# Altium PCB PCB.PcbDoc (part 2 of 2)
Units mm, origin at the board's own origin, x right, y up, seen from the top; angles counter-clockwise.
Board outline 140.5 x 50 mm, 2 copper layers (Top Layer, Bottom Layer), stack 1.69 mm thick; 191 components, 142 nets, 1154 pads, 548 vias.
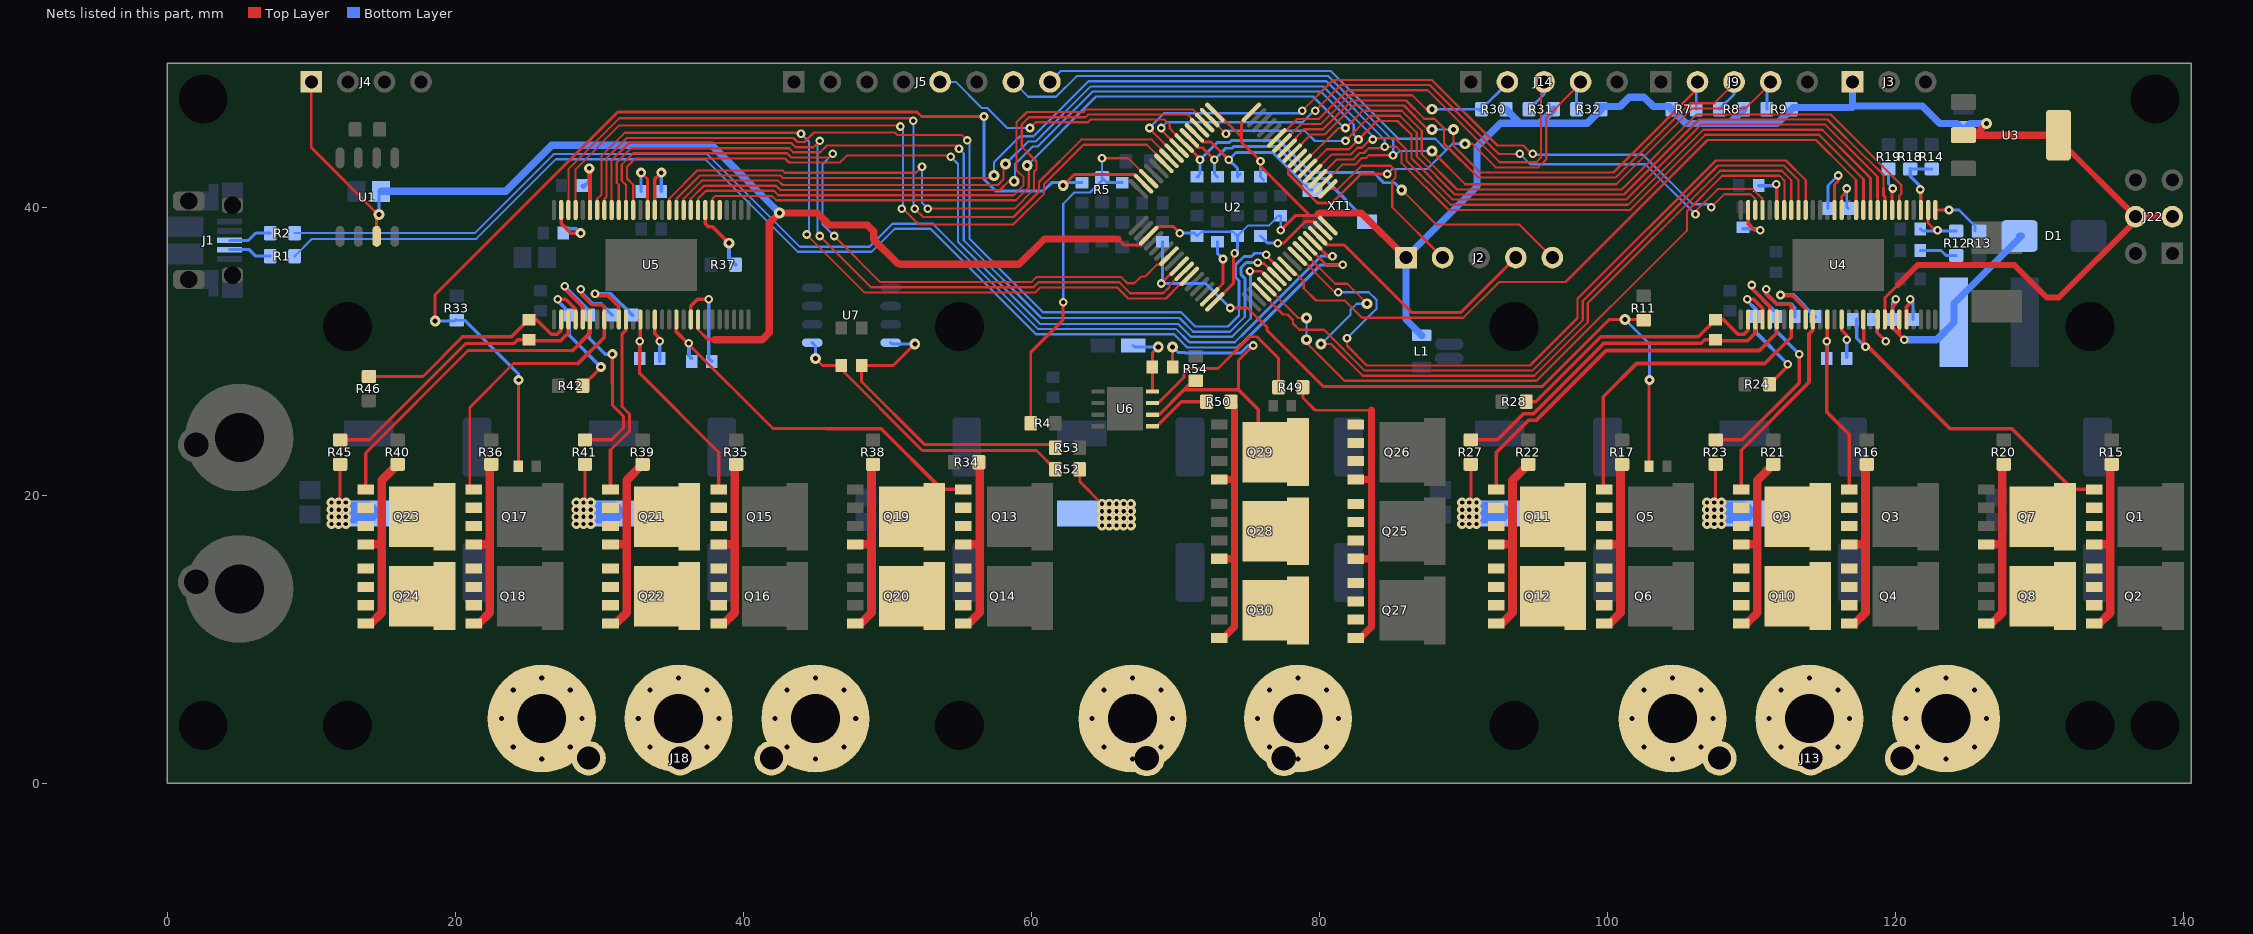
[diagram p2: the nets of this part, all layers, seen from the top]

## Via types
v1: diameter 0.7, hole 0.3, Top Layer to Bottom Layer, 161 vias
v2: diameter 0.8, hole 0.3, Top Layer to Bottom Layer, 136 vias
v3: diameter 0.6, hole 0.3, Top Layer to Bottom Layer, 108 vias
v4: diameter 0.7, hole 0.35, Top Layer to Bottom Layer, 81 vias
v5: diameter 0.75, hole 0.35, Top Layer to Bottom Layer, 57 vias
v6: diameter 0.7, hole 0.3, Top Layer to Bottom Layer, tented bottom, 4 vias
v7: diameter 0.6, hole 0.3, Top Layer to Bottom Layer, tented both sides, 1 vias

## Nets (pads, with @x,y where several pads share a name; then routed paths per layer and width w, separated by ;. In a path a pad name is that pad's centre, name@x,y a point inside that pad or via, vN(x,y) a via of type N, cw(c..) or ccw(c..) an arc to the next point about the centre after c; other vN are vias at no path point) (continued)
M0_BH_1: U2.42 U4.19 | length 52.5
  Top Layer w0.152: U2.42@78.455,36.606 78.555,36.606 81.061,34.1 v3(81.3,34.1) ; v3(81.9,30.9) 81.9,30.395 83.285,29.01 94.614,29.01 97.911,32.307 97.911,33.64 107.517,43.245 112.382,43.245 113.75,41.877 U4.19@113.75,39.8
  Bottom Layer w0.152: v3(81.3,34.1) 83.425,34.1 83.954,33.571 83.954,32.954 v3(81.9,30.9)
M0_BL_1: U2.35 U4.20 | length 48.9
  Top Layer w0.152: U2.35@75.98,34.131 75.98,34.031 77.457,32.554 77.771,32.554 78.154,32.171 78.154,31.921 78.584,31.49 80.302,31.49 83.138,28.655 94.761,28.655 98.266,32.159 98.266,33.492 107.664,42.89 112.234,42.89 113.25,41.874 U4.20@113.25,39.8
M0_CH_1: U2.43 U4.21 | length 53.2
  Top Layer w0.152: U2.43@78.808,36.959 81.089,34.679 81.921,34.679 v5(83.3,33.3) ; v5(80.1,30.5) 80.79,30.5 82.99,28.299 94.909,28.299 98.622,32.012 98.622,33.345 107.811,42.535 112.087,42.535 112.75,41.872 U4.21@112.75,39.8
  Bottom Layer w0.152: v5(80.1,30.5) 80.125,30.5 82.154,32.529 82.154,32.869 82.585,33.3 v5(83.3,33.3)
M0_CL_1: U2.36 U4.22 | length 48.6
  Top Layer w0.152: U2.36@76.333,34.454 U2.36@76.333,34.485 76.343,34.485 78.528,32.3 v5(79.1,32.3) ; v5(79.1,30.8) 79.1,30.575 81.731,27.944 95.056,27.944 105.519,38.407 105.519,39.74 107.958,42.179 111.94,42.179 112.279,41.84 112.279,39.829 U4.22@112.25,39.8
  Bottom Layer w0.152: v5(79.1,30.8) v5(79.1,32.3)
M0_DC_CAL_1: U2.40 U4.12 | length 49.6
  Top Layer w0.152: U2.40@77.748,35.899 77.848,35.899 78.9,34.847 78.9,34.375 79.754,33.521 81.744,33.521 82.946,32.319 89.978,32.319 92.469,34.811 97.072,34.811 106.928,44.667 114.459,44.667 116.5,42.626 117.255,41.871
  Top Layer w0.203: U4.12@117.25,39.8 117.25,40.824 117.255,40.829 117.255,41.871
M0_ENC_A_1: J9.2 R7.2 U2.56 | length 37.1
  Top Layer w0.152: v5(87.8,45.4) 87.513,45.4 85.857,47.056 82.383,47.056 80.382,45.055 79.408,45.055 U2.56@78.295,43.941 ; v5(89.3,45.4) 89.3,44.275 91.165,42.41 100.41,42.41 106.24,48.24 J9.2@106.24,48.6 ; U2.56@78.295,43.941 78.295,44.005 78.101,43.812 U2.56@78.101,43.748 U2.56@78.295,43.941
  Bottom Layer w0.152: v5(87.8,45.4) v5(89.3,45.4)
  Bottom Layer w0.203: R7.2@106.15,46.8 106.15,48.51 J9.2@106.24,48.6
M0_ENC_B_1: J9.3 R8.2 U2.57 | length 40.4
  Top Layer w0.152: U2.57@77.748,44.101 78.381,44.734 78.381,44.857 78.934,45.41 80.234,45.41 82.236,47.412 86.004,47.412 87.27,46.146 87.979,46.146 88.645,45.48 88.645,44.428 91.018,42.055 100.557,42.055 105.718,47.215 107.395,47.215 108.78,48.6 J9.3@108.78,48.445
  Bottom Layer w0.203: R8.2@107.75,46.8 108.78,47.83 J9.3@108.78,48.6
M0_ENC_Z_1: J5.7 J9.4 R9.2 U2.50 | length 68.1
  Top Layer w0.152: U2.50@80.223,41.626 80.236,41.626 81.565,42.955 82.482,42.955 82.937,43.41 83.234,43.41 83.424,43.6 v3(85.1,43.6) ; v5(87.8,43.9) 90.111,41.589 100.594,41.589 105.865,46.86 109.58,46.86 J9.4@111.32,48.6
  Bottom Layer w0.152: J5.7@58.74,48.7 59.769,47.671 61.706,47.671 63.134,49.099 80.622,49.099 85.11,44.611 85.11,43.61 v3(85.1,43.6) 85.262,43.6 85.562,43.9 v5(87.8,43.9)
  Bottom Layer w0.203: R9.2@111.05,46.8 111.05,48.33 J9.4@111.32,48.6
M0_NCS_1: U2.2 U4.8 | length 57.8
  Top Layer w0.152: U2.2@72.374,46.223 73.496,45.1 v3(73.5,45.1) ; v3(81.8,44.6) 81.8,44.619 83.526,46.345 85.562,46.345 86.745,45.163 86.745,43.527 89.394,40.878 101.129,40.878 106.339,46.089 115.263,46.089 117.961,43.39 117.997,43.39 119.145,42.242 119.145,41.371
  Top Layer w0.203: 119.145,41.371 119.145,40.829 119.25,40.724 U4.8@119.25,39.8
  Bottom Layer w0.152: v3(73.5,45.1) 73.7,45.3 78.981,45.3 79.681,44.6 80.4,44.6 80.8,44.6 v3(81.8,44.6)
M0_SO1_1: U2.8 U4.25 | length 50.5
  Top Layer w0.152: v3(69,45.5) 69,45.354 U2.8@70.252,44.101 ; v3(79.7,46.7) 81.478,48.478 87.65,48.478 92.428,43.7 v3(93.9,43.7) ; v3(106.098,39.5) 106.098,39.717 107.636,41.255 110.073,41.255 110.75,40.579 U4.25@110.75,39.8
  Bottom Layer w0.152: v3(69,45.5) 69.4,45.9 78.819,45.9 79.619,46.7 v3(79.7,46.7) ; v3(93.9,43.7) 94.619,42.981 102.617,42.981 v3(106.098,39.5)
M0_SO2_1: U2.9 U4.26 | length 50.8
  Top Layer w0.152: v3(68.197,45.5) 68.197,45.449 U2.9@69.899,43.748 ; v3(78.8,46.7) 80.933,48.833 87.797,48.833 92.351,44.279 94.14,44.279 94.719,43.7 v3(94.8,43.7) ; v3(107.2,40) 108.1,40.9 109.926,40.9 110.25,40.576 U4.26@110.25,39.8
  Bottom Layer w0.152: v3(68.197,45.5) 68.197,45.516 69.202,46.521 78.621,46.521 v3(78.8,46.7) ; v3(94.8,43.7) 94.854,43.646 102.454,43.646 105.9,40.2 107,40.2 v3(107.2,40)
M0_TEMP_1: C23.2 R10.1 R11.1 U2.25 | length 54.1
  Top Layer w0.203: v3(69,34.7) 70.199,35.899 U2.25@70.252,35.899 ; v3(73.8,33) 75.004,33 76.365,31.638 76.365,31.438 80.24,27.563 95.468,27.563 100.105,32.2 v5(101.2,32.2) 102.45,32.2 R11.1@102.5,32.15 ; R10.1@102.875,22 102.875,27.975 v1(102.9,28)
  Bottom Layer w0.203: C23.2@69.1,37.6 69.1,34.8 v3(69,34.7) 72.1,34.7 v3(73.8,33) ; v5(101.2,32.2) 102.9,30.5 v1(102.9,28)
M1_AH_1: U2.37 U5.17 | length 61.1
  Top Layer w0.152: U5.17@32.35,39.8 32.35,41.558 31.915,41.992 31.915,42.808 32.492,43.385 42.886,43.385 43.171,43.099 46.697,43.099 47.177,43.579 54.321,43.579 v3(54.4,43.5)
  Top Layer w0.203: v3(75.164,35.564) 75.179,35.55 75.975,35.55 U2.37@76.687,34.838
  Bottom Layer w0.152: v3(54.4,43.5) 54.9,43 54.9,37.596 60.596,31.9 70.177,31.9 71.077,31 73.923,31 75.217,32.294 75.217,33.05
  Bottom Layer w0.203: v3(75.164,35.564) 75.217,35.512 75.217,33.05
M1_AL_1: U2.23 U5.18 | length 50.6
  Top Layer w0.152: U5.18@31.85,39.8 31.85,41.555 31.56,41.845 31.56,42.955 32.345,43.74 43.033,43.74 43.318,43.455 45.955,43.455 v3(46.2,43.7) ; v3(46.3,38) 49.504,34.796 59.988,34.796 60.337,35.145 66.236,35.145 66.66,34.721 67.14,34.721 67.598,35.179 67.886,35.179 68.706,36 69.039,36 69.445,36.406 69.445,36.606 U2.23@69.545,36.606
  Bottom Layer w0.152: v3(46.2,43.7) 45.5,43 45.5,38.8 v3(46.3,38)
M1_BH_1: U2.38 U5.19 | length 63.6
  Top Layer w0.152: U5.19@31.35,39.8 31.35,41.552 31.205,41.698 31.205,43.102 32.198,44.095 43.18,44.095 43.466,43.81 45.329,43.81 45.798,44.279 54.756,44.279 v3(54.968,44.068)
  Top Layer w0.203: v3(75.71,36.155) 75.769,36.095 76.137,36.095 U2.38@77.041,35.192
  Bottom Layer w0.152: v3(54.968,44.068) 55.3,43.736 55.3,37.698 60.698,32.3 70.279,32.3 71.224,31.355 73.776,31.355 74.811,32.39 74.811,33.05
  Bottom Layer w0.203: 74.811,33.05 74.811,35.063 74.56,35.314 74.56,35.815 74.914,36.169 75.695,36.169 v3(75.71,36.155)
M1_BL_1: U2.26 U5.20 | length 53.4
  Top Layer w0.152: U5.20@30.85,39.8 30.85,41.55 ; 30.849,41.551 30.849,43.249 32.051,44.451 43.327,44.451 43.613,44.165 44.865,44.165 v3(45.3,44.6) ; v3(45.3,38) 48.859,34.441 60.136,34.441 60.485,34.79 66.088,34.79 66.857,34.021 69.14,34.021 69.579,34.46 69.579,34.584 69.947,34.953 70.072,34.953 70.606,35.487 U2.26@70.606,35.545
  Bottom Layer w0.152: v3(45.3,38) 45.145,38.155 45.145,44.445 v3(45.3,44.6)
M1_CH_1: U2.39 U5.21 | length 66
  Top Layer w0.152: U5.21@30.35,39.8 30.35,40.579 30.494,40.723 30.494,43.397 31.903,44.806 43.475,44.806 43.76,44.521 44.24,44.521 44.898,45.179 50.502,45.179 50.66,45.021 55.15,45.021 v3(55.536,44.636)
  Top Layer w0.203: v3@76.3,36.639 U2.39@77.394,35.545
  Bottom Layer w0.152: v3(55.536,44.636) 55.7,44.471 55.7,37.8 60.8,32.7 62,32.7 70.381,32.7 71.36,31.721 73.64,31.721 74.405,32.486 74.405,32.905
  Bottom Layer w0.203: 74.405,32.905 74.405,34.895 74.154,35.146 74.154,35.983 74.746,36.575 75.275,36.575 75.5,36.8 76,36.8 76.1,36.7 v3(76.3,36.7)
M1_CL_1: U2.27 U5.22 | length 55.2
  Top Layer w0.152: U5.22@29.85,39.8 29.85,40.581 30.138,40.87 30.138,43.544 31.756,45.162 43.938,45.162 v3(44,45.1) ; v3(44.4,38.1) 44.4,38.081 48.395,34.085 60.283,34.085 60.632,34.435 65.941,34.435 66.71,33.665 69.333,33.665 70.265,34.597 70.389,34.597 70.399,34.588 70.455,34.588 70.859,34.991 70.859,35.192 U2.27@70.959,35.192
  Bottom Layer w0.152: v3(44,45.1) 44.555,44.545 44.555,38.255 v3(44.4,38.1)
M1_DC_CAL_1: U2.4 U5.12 | length 48.5
  Top Layer w0.152: U5.12@34.85,39.8 34.85,40.587 36.82,42.556 42.709,42.556 42.877,42.388 51.988,42.388 v3(52.4,42.8) ; v3(52.8,39.9) 58.83,39.9 60.165,41.235 60.165,42.44 60.354,42.629 60.354,43.171 59.321,44.204 59.321,45.74 59.83,46.249 63.76,46.249 63.945,46.435 70.848,46.435 71.566,45.716 71.566,45.515 U2.4@71.667,45.515
  Bottom Layer w0.152: v3(52.4,42.8) 52.4,40.3 v3(52.8,39.9)
M1_ENC_A_1: J14.2 R30.2 U2.58 | length 18.3
  Top Layer w0.152: U2.58@77.394,44.455 78.705,45.765 80.087,45.765 82.089,47.767 86.433,47.767 87.4,46.8 v5(87.8,46.8)
  Bottom Layer w0.203: v5(87.8,46.8) 91.05,46.8 91.15,46.7 R30.2@91.25,46.8 91.25,46.81 J14.2@93.04,48.6
M1_ENC_B_1: J14.3 R31.2 U2.59 | length 29.8
  Top Layer w0.152: U2.59@77.041,44.808 77.141,44.808 78.453,46.121 79.94,46.121 81.942,48.122 87.503,48.122 92.504,43.121 95.04,43.121 95.379,43.46 95.379,48.38 95.8,48.38 J14.3@95.58,48.6
  Bottom Layer w0.203: R31.2@94.55,46.8 95.58,47.83 J14.3@95.58,48.6
M1_ENC_Z_1: J5.8 J14.4 R32.2 U2.55 | length 61
  Top Layer w0.152: v5(90.1,44.4) 90.595,44.4 92.229,42.765 95.187,42.765 95.735,43.313 95.735,46.215 J14.4@98.12,48.6
  Top Layer w0.203: U2.55@78.455,43.394 77.823,42.763 77.823,42.322 79.857,40.288 80.856,40.288 82.868,42.3 v3(84.7,42.3)
  Bottom Layer w0.152: J5.8@61.28,48.7 62.034,49.454 80.769,49.454 85.477,44.746 88.029,44.746 88.8,43.975 ; v3(84.7,42.3) 85.045,42.645 87.47,42.645 88.8,43.975 ; v5(90.1,44.4) 89.225,44.4 88.8,43.975
  Bottom Layer w0.203: R32.2@97.85,46.8 97.85,48.33 J14.4@98.12,48.6
M1_NCS_1: U2.3 U5.8 | length 42.5
  Top Layer w0.152: U5.8@36.85,39.8 36.85,40.576 37.408,41.135 42.12,41.135 42.42,40.835 58.76,40.835 59.454,41.529 59.454,42.071 58.965,42.56 58.965,45.887 59.683,46.605 63.612,46.605 63.798,46.79 71.199,46.79 71.92,46.069 71.92,45.869 U2.3@72.02,45.869
M1_SO1_1: U2.11 U5.25 | length 54.5
  Top Layer w0.152: U5.25@28.35,39.8 28.35,42.64 31.389,45.679 50.821,45.679 v3(50.9,45.6) ; v3(51,39.9) 51.081,39.9 52.181,38.8 58.736,38.8 60.876,40.94 60.876,41.604 63.607,44.335 67.998,44.335 69.092,43.241 69.092,43.041 U2.11@69.192,43.041
  Bottom Layer w0.152: v3(50.9,45.6) 51.079,45.421 51.079,39.979 v3(51,39.9)
M1_SO2_1: U2.10 U5.26 | length 55.6
  Top Layer w0.152: U5.26@27.85,39.8 27.85,42.642 31.387,46.179 51.621,46.179 v3(51.8,46) ; v3(51.9,39.9) 52.479,39.321 58.754,39.321 60.52,41.087 60.52,41.751 63.46,44.69 68.349,44.69 69.445,43.594 69.445,43.394 U2.10@69.545,43.394
  Bottom Layer w0.152: v3(51.8,46) 51.8,40 v3(51.9,39.9)
M1_TEMP_1: C41.2 R29.1 R33.1 U2.15 | length 77.1
  Top Layer w0.203: v5(18.6,32.1) 18.6,33.931 31.274,46.605 52.05,46.605 52.355,46.3 v3(56.7,46.3) ; R29.1@24.375,22 24.4,22.025 v1(24.4,28) ; v5(62.2,41.5) 62.958,42.258 67.211,42.258 67.713,41.755 67.713,41.626 U2.15@67.777,41.626
  Bottom Layer w0.203: v5(18.6,32.1) 19.95,32.1 20.05,32.2 R33.1@20.1,32.15 20.65,32.15 24.4,28.4 v1(24.4,28) ; v3(56.7,46.3) 56.7,41.939 57.519,41.12 60.821,41.12 61.4,41.7 C41.2@63.5,41.7
NetC2_1: C2.1 U2.6 XT1.1 | length 16.9
  Top Layer w0.203: U2.6@70.959,44.808 71.024,44.808 71.024,44.68 71.579,44.124 71.876,44.124 v3(72.7,43.3)
  Bottom Layer w0.203: C2.1@72.9,42.1 72.7,42.3 v3(72.7,43.3) 73.49,44.09 73.919,44.09 74.04,44.21 77.026,44.21 79.232,42.005 80.326,42.005 83.3,39.031 XT1.1@83.3,39
NetC3_1: C3.1 U2.5 XT1.3 | length 12.1
  Top Layer w0.203: U2.5@71.313,45.162 71.377,45.162 71.377,45.033 71.88,44.531 72.469,44.531 v3(73.7,43.3)
  Bottom Layer w0.203: C3.1@74.5,42.3 C3.1@74.3,42.1 74.3,42.7 v3(73.7,43.3) 73.703,43.3 74.208,43.804 76.747,43.804 79.352,41.2 XT1.3@79.5,41.2
NetC4_2: C4.2 U2.47 | length 5.5
  Top Layer w0.203: v3(77.1,37.5) 77.5,37.5 79.005,39.005 79.61,39.005 79.662,38.952 79.708,38.952 80.158,38.502 80.158,38.374 U2.47@80.223,38.374
  Bottom Layer w0.203: C4.2@75.9,38 76.4,37.5 v3(77.1,37.5)
NetC5_2: C5.2 U2.31 | length 4.4
  Top Layer w0.203: U2.31@72.374,33.777 73.3,34.704 v3(73.3,36.4)
  Bottom Layer w0.203: C5.2@72.9,37.6 72.9,36.8 v3(73.3,36.4)
NetC24_1: C24.1 R12.1 U4.2 | length 4.3
  Top Layer w0.203: U4.2@122.25,39.8 122.25,38.894 122.744,38.4 v3(122.9,38.4)
  Bottom Layer w0.203: C24.1@121.7,38.5 121.85,38.35 R12.1@124.2,38.35
NetC27_1: C27.1 R12.2 | length 2.6
  Bottom Layer w0.203: C27.1@121.7,37 123.15,37 123.5,36.65 R12.2@124.2,36.65
NetC28_1: C28.1 D1.K L2.1 U4.50 U4.51 | length 17.8
  Top Layer w0.25: v3(120,33.6) 120,33.3 119.75,33.05 119.75,31.65 120.25,31.15 ; U4.51@120.25,32.2 120.25,31.15 ; v3(120.6,30.8) 120.25,31.15
  Bottom Layer w0.25: C28.1@119.8,32.2 119.8,33.4 v3(120,33.6)
  Bottom Layer w0.5: v3(120.6,30.8) 122.84,30.8 L2.1@124.04,32 124.04,33.311 128.729,38 D1.K@128.6,38
NetC28_2: C28.2 U4.52 | length 3
  Top Layer w0.25: U4.52@120.75,32.2 120.75,33.091 121,33.341 v3(121,33.6)
  Bottom Layer w0.203: v3(121,33.6) 121.2,33.4 C28.2@121.2,32.2
NetC30_2: C30.2 U4.48 | length 3.5
  Top Layer w0.203: U4.48@118.75,32.2 118.75,31.25 v3(119.3,30.7)
  Bottom Layer w0.203: C30.2@118.7,32.2 118.7,31.3 v3(119.3,30.7)
NetC31_2: C31.2 U4.43 | length 2.8
  Top Layer w0.203: U4.43@116.25,32.2 U4.43@116.261,32.189
  Top Layer w0.25: U4.43@116.25,32.2 116.25,31.45 116.6,31.1 v3(116.6,30.8)
  Bottom Layer w0.25: C31.2@116.6,29.6 v3(116.6,30.8)
NetC33_1: C33.1 U4.14 | length 3.1
  Top Layer w0.203: U4.14@116.25,39.8 116.25,40.75 116.6,41.1 v3(116.6,41.3)
  Bottom Layer w0.203: v3(116.6,41.3) 116.6,40 C33.1@116.7,39.9
NetC33_2: C33.2 U4.15 | length 5.1
  Top Layer w0.203: U4.15@115.75,39.8 115.75,41.55 116,41.8 v3(116,42.2)
  Bottom Layer w0.203: C33.2@115.3,39.9 115.3,41.5 v3(116,42.2)
NetC34_2: C34.2 U4.38 | length 6
  Top Layer w0.25: v3(112,33.9) 112.033,33.867 112.809,33.867 113.75,32.926 113.75,32.378 113.772,32.4 113.772,32.222 U4.38@113.75,32.2
  Bottom Layer w0.25: v3(112,33.9) 112.9,33.9 C34.2@114.4,32.4
NetC35_2: C35.2 U4.23 | length 3.1
  Top Layer w0.25: v3(111.7,41.6) 111.75,41.55 U4.23@111.75,39.8
  Bottom Layer w0.25: C35.2@110.5,41.5 111.6,41.5 v3(111.7,41.6)
NetC36_1: C36.1 R23.2 U4.33 | length 18.6
  Top Layer w0.25: R23.2@107.5,23.85 109.35,23.85 113.3,27.8 v3(113.3,29.8) ; v3(110,34.6) 110,34.371 111.25,33.121 U4.33@111.25,32.2
  Bottom Layer w0.25: v3(110,34.6) 110,34.371 111.552,32.819 111.681,32.819 111.7,32.8 C36.1@111.7,32.4 111.7,31.4 v3(113.3,29.8)
NetC36_2: C36.2 R24.2 U4.32 | length 9.7
  Top Layer w0.25: v3(109.7,33.6) 110.131,33.6 110.75,32.981 U4.32@110.75,32.2 ; R24.2@111.25,27.7 112.5,28.95 v3(112.5,29.1)
  Bottom Layer w0.25: v3(109.7,33.6) 109.7,33.5 110.3,32.9 C36.2@110.3,32.4 110.3,31.3 v3(112.5,29.1)
NetC37_2: C37.2 U4.27 | length 3.2
  Top Layer w0.25: U4.27@109.75,39.8 109.75,38.861 110.211,38.4 v3(110.6,38.4)
  Bottom Layer w0.25: C37.2@109.4,38.5 110.5,38.5 v3(110.6,38.4)
NetC40_1: C40.1 R27.2 U4.31 | length 23.9
  Top Layer w0.25: R27.2@90.5,23.85 92.35,23.85 94.172,25.672 94.87,25.672 99.7,30.502 99.7,30.547 106.488,30.547 106.741,30.8 C40.1@107.5,30.8 107.581,30.719 109.708,30.719 110.228,31.239 110.228,32.2 U4.31@110.25,32.2
NetC40_2: C40.2 R28.2 U4.30 | length 19.1
  Top Layer w0.25: R28.2@94.35,26.5 95.012,26.5 99.512,31 106.3,31 C40.2@107.5,32.2 108.024,32.2 109.052,31.172 109.472,31.172 109.7,31.4 109.7,31.424 109.728,31.424 109.728,32.178 U4.30@109.75,32.2
NetC42_2: C42.2 U5.48 | length 6.8
  Top Layer w0.25: U5.48@36.35,32.2 36.35,33.139 36.811,33.6 v3(37.6,33.6)
  Bottom Layer w0.25: v3(37.6,33.6) 37.6,29.5 C42.2@37.8,29.3
NetC43_2: C43.2 U5.43 | length 3
  Top Layer w0.25: U5.43@33.85,32.2 33.85,31.23 34.2,30.88 v3(34.2,30.7)
  Bottom Layer w0.25: C43.2@34.2,29.3 v3(34.2,30.7)
NetC45_1: C45.1 U5.14 | length 4.1
  Top Layer w0.25: U5.14@33.85,39.8 33.85,41.95 v1(34.3,42.4)
  Bottom Layer w0.25: C45.1@34.3,41.1 v1(34.3,42.4)
NetC45_2: C45.2 U5.15 | length 4.1
  Top Layer w0.203: v1(32.9,42.4) 33.35,41.95 U5.15@33.35,39.8
  Bottom Layer w0.203: C45.2@32.9,41.1 v1(32.9,42.4)
NetC46_2: C46.2 U5.38 | length 6.3
  Top Layer w0.25: v3(29.7,34) 29.7,33.834 29.733,33.867 30.574,33.867 31.35,33.091 U5.38@31.35,32.2
  Bottom Layer w0.25: v3(29.7,34) 30.8,34 C46.2@32.3,32.5
NetC47_2: C47.2 U5.23 | length 4.5
  Top Layer w0.25: v1(29.3,42.7) 29.35,42.65 U5.23@29.35,39.8
  Bottom Layer w0.25: C47.2@28.8,41.5 28.9,41.4 29.3,41.8 v1(29.3,42.7)
NetC48_1: C48.1 R41.2 U5.33 | length 17.7
  Top Layer w0.203: 30.85,23.85 31.68,24.68 31.68,25.481 30.9,26.261 30.9,27.8
  Top Layer w0.25: v3(27.6,34.5) 27.6,34.317 28.828,33.089 28.828,32.2 U5.33@28.85,32.2 ; R41.2@29,23.85 30.85,23.85 ; 30.9,27.8 v1(30.9,29.8)
  Bottom Layer w0.25: v3(27.6,34.5) 29.3,32.8 29.3,30.9 30.4,29.8 v1(30.9,29.8)
NetC48_2: C48.2 R42.2 U5.32 | length 10.2
  Top Layer w0.25: v3(27.1,33.6) 27.676,33.6 28.328,32.948 28.328,32.2 U5.32@28.35,32.2 ; R42.2@28.85,27.6 30.1,28.85 v1(30.1,28.9) v1@29.9,28.9
  Bottom Layer w0.25: v3(27.1,33.6) 27.1,33.5 27.9,32.7 27.9,31.1 v1(30.1,28.9)
NetC49_2: C49.2 U5.27 | length 3.2
  Top Layer w0.25: U5.27@27.35,39.8 27.35,38.861 28.011,38.2 v1(28.7,38.2)
  Bottom Layer w0.25: C49.2@27.8,38.5 28.4,38.5
NetC52_1: C52.1 R45.2 U5.31 | length 19.9
  Top Layer w0.203: 14.05,23.85 20.747,30.547 24.088,30.547
  Top Layer w0.25: R45.2@12,23.85 14.05,23.85 ; 24.088,30.547 24.341,30.8 C52.1@25.1,30.8 25.181,30.719 27.308,30.719 27.828,31.239 27.828,32.2 U5.31@27.85,32.2
NetC52_2: C52.2 R46.2 U5.30 | length 16.3
  Top Layer w0.203: R46.2@14,28.25 17.75,28.25 20.5,31
  Top Layer w0.25: 20.5,31 23.9,31 C52.2@25.1,32.2 25.624,32.2 26.652,31.172 27.072,31.172 27.3,31.4 27.3,31.424 27.328,31.424 27.328,32.178 U5.30@27.35,32.2
NetC54_1: C54.1 D2.K U6.8 | length 5.1
  Top Layer w0.203: U6.8@68.395,27.2 68.4,27.205 C54.1@68.4,28.9 68.4,29.9 v5(68.8,30.3)
  Bottom Layer w0.203: D2.K@67.05,30.4 67.15,30.3 v5(68.8,30.3)
NetC54_2: C54.2 J19.1 J21.2 Q25.S Q26.S Q27.S Q28.D Q29.D Q30.D R54.1 U6.6 | length 23.6
  Top Layer w0.203: C54.2@69.8,28.9 v5(69.8,30.3) ; 74.37,27.328 74.37,29.37 v3(75.4,30.4)
  Top Layer w0.25: U6.6@68.395,25.6 68.859,25.6 70.587,27.328 ; R54.1@71.4,27.95 71.209,27.95 70.587,27.328 ; Q29.D@75.75,23 75.75,25.948 74.37,27.328 70.587,27.328
  Bottom Layer w0.203: v5(69.8,30.3) 70.2,29.9 70.66,29.9 70.676,29.884 74.535,29.884 75.051,30.4 75.151,30.3 75.251,30.4 v3(75.4,30.4)
  other v4: 78.5,1.7 76.52,2.52 80.48,2.52 75.7,4.5 81.3,4.5 76.52,6.48 80.48,6.48 78.5,7.3
NetC56_1: C56.1 R52.1 U7.1 | length 21.3
  Top Layer w0.203: v5(45,29.5) 45.5,29 C56.1@46.526,29 ; C56.1@46.8,29 C56.1@46.526,29 ; R52.1@61.65,21.8 60.345,23.105 52.421,23.105 C56.1@46.526,29
  Bottom Layer w0.203: U7.1@44.775,30.595 45,30.37 v5(45,29.5)
NetC56_2: C56.2 R53.1 U7.8 | length 22.5
  Top Layer w0.203: v5(51.9,30.5) 50.4,29 C56.2@48.2,29 48.2,27.9 52.589,23.511 61.439,23.511 R53.1@61.65,23.3
  Bottom Layer w0.203: U7.8@50.225,30.595 50.32,30.5 v5(51.9,30.5)
NetJ1_2: J1.2 R1.1 | length 3
  Bottom Layer w0.203: J1.2@4.325,37.05 5.7,37.05 6.15,36.6 R1.1@7.15,36.6
NetJ1_3: J1.3 R2.1 | length 3
  Bottom Layer w0.203: J1.3@4.325,37.7 5.65,37.7 6.15,38.2 R2.1@7.15,38.2
NetJ20_1: J20.1 J21.1 R51.1 R52.2 | length 3.2
  Top Layer w0.203: R52.2@63.35,21.8 63.35,20.95 v1(64.9,19.4) v1@65,19.5
  other v1: 64.9,17.9 65.4,17.9 65.9,17.9 66.4,17.9 66.9,17.9 64.9,18.4 65.4,18.4 65.9,18.4 66.4,18.4 66.9,18.4 64.9,18.9 65.4,18.9 65.9,18.9 66.4,18.9 66.9,18.9 65.4,19.4 65.9,19.4 66.4,19.4 66.9,19.4
  other v4: 67,1.7 65.02,2.52 68.98,2.52 64.2,4.5 69.8,4.5 65.02,6.48 68.98,6.48 67,7.3
NetQ1_G: Q1.G Q2.G R15.2 | length 29.6
  Top Layer w0.6: Q2.G@133.775,11.095 134.141,11.095 134.897,11.851 134.897,16.595 ; Q1.G@133.775,16.595 134.897,16.595 ; R15.2@135,22.15 R15.2@134.897,22.15 ; 134.897,16.595 R15.2@134.897,22.15 ; 134.897,16.595 R15.2@134.897,22.15 ; 134.897,16.595 R15.2@134.897,22.15 ; 134.897,16.595 R15.2@134.897,22.15
NetQ3_G: Q3.G Q4.G R16.2 | length 29.6
  Top Layer w0.6: Q4.G@116.775,11.095 117.141,11.095 117.897,11.851 117.897,16.595 ; Q3.G@116.775,16.595 117.897,16.595 ; R16.2@118,22.15 R16.2@117.897,22.15 ; 117.897,16.595 R16.2@117.897,22.15 ; 117.897,16.595 R16.2@117.897,22.15 ; 117.897,16.595 R16.2@117.897,22.15 ; 117.897,16.595 R16.2@117.897,22.15
NetQ5_G: Q5.G Q6.G R17.2 | length 29.6
  Top Layer w0.6: Q6.G@99.775,11.095 100.141,11.095 100.897,11.851 100.897,16.595 ; Q5.G@99.775,16.595 100.897,16.595 ; R17.2@101,22.15 R17.2@100.897,22.15 ; 100.897,16.595 R17.2@100.897,22.15 ; 100.897,16.595 R17.2@100.897,22.15 ; 100.897,16.595 R17.2@100.897,22.15 ; 100.897,16.595 R17.2@100.897,22.15
NetQ7_G: Q7.G Q8.G R20.2 | length 29.6
  Top Layer w0.6: Q8.G@126.275,11.095 126.641,11.095 127.397,11.851 127.397,16.595 ; Q7.G@126.275,16.595 127.397,16.595 ; R20.2@127.5,22.15 R20.2@127.397,22.15 ; 127.397,16.595 R20.2@127.397,22.15 ; 127.397,16.595 R20.2@127.397,22.15 ; 127.397,16.595 R20.2@127.397,22.15 ; 127.397,16.595 R20.2@127.397,22.15
NetQ9_G: Q9.G Q10.G R21.2 | length 13.3
  Top Layer w0.6: Q10.G@109.275,11.095 109.641,11.095 110.397,11.851 110.397,16.595 ; Q9.G@109.275,16.595 110.397,16.595 ; R21.2@111.5,22.15 110.397,21.047 110.397,16.595
NetQ11_G: Q11.G Q12.G R22.2 | length 13.3
  Top Layer w0.6: Q12.G@92.275,11.095 92.641,11.095 93.397,11.851 93.397,16.595 ; Q11.G@92.275,16.595 93.397,16.595 ; R22.2@94.5,22.15 93.397,21.047 93.397,16.595
NetQ13_G: Q13.G Q14.G R34.2 | length 29.6
  Top Layer w0.6: Q14.G@55.275,11.095 55.641,11.095 56.397,11.851 56.397,16.595 ; Q13.G@55.275,16.595 56.397,16.595 ; R34.2@56.5,22.15 R34.2@56.397,22.15 ; 56.397,16.595 R34.2@56.397,22.15 ; 56.397,16.595 R34.2@56.397,22.15 ; 56.397,16.595 R34.2@56.397,22.15 ; 56.397,16.595 R34.2@56.397,22.15
NetQ15_G: Q15.G Q16.G R35.2 | length 29.6
  Top Layer w0.6: Q16.G@38.275,11.095 38.641,11.095 39.397,11.851 39.397,16.595 ; Q15.G@38.275,16.595 39.397,16.595 ; R35.2@39.5,22.15 R35.2@39.397,22.15 ; 39.397,16.595 R35.2@39.397,22.15 ; 39.397,16.595 R35.2@39.397,22.15 ; 39.397,16.595 R35.2@39.397,22.15 ; 39.397,16.595 R35.2@39.397,22.15
NetQ17_G: Q17.G Q18.G R36.2 | length 29.6
  Top Layer w0.6: Q18.G@21.275,11.095 21.641,11.095 22.397,11.851 22.397,16.595 ; Q17.G@21.275,16.595 22.397,16.595 ; R36.2@22.5,22.15 R36.2@22.397,22.15 ; 22.397,16.595 R36.2@22.397,22.15 ; 22.397,16.595 R36.2@22.397,22.15 ; 22.397,16.595 R36.2@22.397,22.15 ; 22.397,16.595 R36.2@22.397,22.15
NetQ19_G: Q19.G Q20.G R38.2 | length 29.6
  Top Layer w0.6: Q20.G@47.775,11.095 48.141,11.095 48.897,11.851 48.897,16.595 ; Q19.G@47.775,16.595 48.897,16.595 ; R38.2@49,22.15 R38.2@48.897,22.15 ; 48.897,16.595 R38.2@48.897,22.15 ; 48.897,16.595 R38.2@48.897,22.15 ; 48.897,16.595 R38.2@48.897,22.15 ; 48.897,16.595 R38.2@48.897,22.15
NetQ21_G: Q21.G Q22.G R39.2 | length 13.3
  Top Layer w0.6: Q22.G@30.775,11.095 31.141,11.095 31.897,11.851 31.897,16.595 ; Q21.G@30.775,16.595 31.897,16.595 ; R39.2@33,22.15 31.897,21.047 31.897,16.595
NetQ23_G: Q23.G Q24.G R40.2 | length 13.3
  Top Layer w0.6: Q24.G@13.775,11.095 14.141,11.095 14.897,11.851 14.897,16.595 ; Q23.G@13.775,16.595 14.897,16.595 ; R40.2@16,22.15 14.897,21.047 14.897,16.595
NetQ25_G: Q25.G Q26.G Q27.G R49.2 | length 24.3
  Top Layer w0.203: R49.2@78.85,27.4 78.85,26.75 79.7,25.9 83.6,25.9
  Top Layer w0.5: Q27.G@82.525,10.095 82.821,10.095 83.6,10.874 83.6,15.6 ; Q25.G@82.525,15.595 83.595,15.595 83.6,15.6 ; Q26.G@82.525,21.095 83.595,21.095 83.6,21.1 ; 83.6,25.9 83.6,21.1 ; 83.6,15.6 83.6,21.1
NetQ28_G: Q28.G Q29.G Q30.G R50.2 | length 18.9
  Top Layer w0.5: Q30.G@73.025,10.095 73.321,10.095 74.1,10.874 74.1,15.6 ; Q28.G@73.025,15.595 74.095,15.595 74.1,15.6 ; Q29.G@73.025,21.095 74.095,21.095 74.1,21.1 ; R50.2@74.1,26.25 74.1,21.1 ; 74.1,15.6 74.1,21.1
NetR13_1: R13.1 U4.1 | length 3.6
  Top Layer w0.203: U4.1@122.75,39.8 v3(123.7,39.8)
  Bottom Layer w0.203: v3(123.7,39.8) 124.4,39.8 125.5,38.7 R13.1@125.5,38.35
NetR14_2: R14.2 R18.1 U4.3 | length 4.7
  Top Layer w0.25: v3(121.7,41.225) 121.75,41.175 U4.3@121.75,39.8
  Bottom Layer w0.203: R18.1@121,42.65 R14.2@122.5,42.65
  Bottom Layer w0.25: R18.1@121,42.65 121,42.15 121.7,41.45 v3(121.7,41.225)
NetR19_1: R19.1 U4.7 | length 2.5
  Top Layer w0.203: U4.7@119.75,39.8 119.75,41.25 v3(119.8,41.3)
  Bottom Layer w0.203: 119.5,42.15 119.5,41.6 v3(119.8,41.3)
NetR37_1: R37.1 U5.7 | length 4.8
  Top Layer w0.25: U5.7@37.35,39.8 37.35,38.861 37.583,38.628 37.872,38.628 v5(39,37.5)
  Bottom Layer w0.25: v5(39,37.5) 39,36.45 R37.1@39.45,36
NetR49_1: R49.1 U6.7 | length 13.5
  Top Layer w0.203: U6.7@68.395,26.4 68.804,26.4 70.595,28.191 70.595,28.46 70.935,28.8 72.945,28.8 75.149,31.005 75.65,31.005 77.15,29.505 R49.1@77.15,27.4
NetR50_1: R50.1 U6.5 | length 4.5
  Top Layer w0.25: U6.5@68.395,24.8 68.7,24.8 70.4,26.5 R50.1@72.15,26.5
NetU4_5: U4.5
NetU5_5: U5.5
NFAULT_1: U2.54 U4.6 U5.6 | length 102.2
  Top Layer w0.152: U5.6@37.85,39.8 37.85,40.576 38.053,40.779 41.973,40.779 42.273,40.48 58.907,40.48 59.81,41.382 59.81,42.79 v5(59.7,42.9) ; U2.54@78.808,43.041 78.87,43.041 81.329,45.5 v3(81.8,45.5) 83.001,46.701 85.71,46.701 87.101,45.31 87.101,43.674 89.541,41.234 100.981,41.234 106.192,46.444 115.475,46.444 120.379,41.54 120.379,40.924 120.25,40.795 U4.6@120.25,39.8
  Bottom Layer w0.152: v5(59.7,42.9) 64.479,47.679 79.54,47.679 81.719,45.5 v3(81.8,45.5)
NRST_1: C6.2 J2.5 J5.5 U2.7 | length 50.7
  Top Layer w0.152: v3(59.9,45.5) 60.294,45.894 63.907,45.894 64.092,46.079 69.24,46.079 69.605,45.715 69.605,45.456 U2.7@70.606,44.455 ; v5(85.7,41.2) 88.1,38.8 93.86,38.8 J2.5@96.16,36.5
  Top Layer w0.203: U2.7@70.606,44.455 71.7,43.361 v3(71.7,43.3)
  Bottom Layer w0.152: J5.5@53.66,48.7 54.745,48.7 56.566,46.879 56.94,46.879 58.319,45.5 v3(59.9,45.5)
  Bottom Layer w0.203: C6.2@71.6,42.1 C6.2@71.5,42.1 71.7,42.3 v3(71.7,43.3) 72.896,44.496 73.75,44.496 73.871,44.616 77.194,44.616 79.4,42.411 83.735,42.411 84.45,41.695 85.204,41.695 v5(85.7,41.2)
SH_A_2: C30.1 J10.1 J13.3 Q1.S Q2.S Q7.D Q8.D U4.46 | length 23.6
  Top Layer w0.25: U4.46@117.75,32.2 117.772,32.178 117.772,30.628 ; v3@118,30.4 123.772,24.628 128.07,24.628 132.293,20.405 Q1.S@133.775,20.405
  Bottom Layer w0.25: C30.1@117.3,32.2 117.3,30.9 v3(117.9,30.3)
  other v4: 123.5,1.7 121.52,2.52 125.48,2.52 120.7,4.5 126.3,4.5 121.52,6.48 125.48,6.48 123.5,7.3
SH_A_3: C42.1 J15.1 J18.3 Q13.S Q14.S Q19.D Q20.D U5.46 | length 26.5
  Top Layer w0.203: v3@36.139,30.544 42.055,24.628 45.772,24.628
  Top Layer w0.25: U5.46@35.35,32.2 35.35,31.333 v3@36.139,30.544 ; 45.772,24.628 49.57,24.628 53.793,20.405 Q13.S@55.275,20.405
  Bottom Layer w0.25: v3(36.204,30.544) 36.224,30.524 36.224,29.797 36.204,29.777 36.204,29.696 C42.1@36.4,29.5
  other v4: 45,1.7 43.02,2.52 46.98,2.52 42.2,4.5 47.8,4.5 43.02,6.48 46.98,6.48 45,7.3
SH_B_2: C31.1 J11.1 J13.2 Q3.S Q4.S Q9.D Q10.D U4.41 | length 13.6
  Top Layer w0.25: U4.41@115.25,32.2 115.25,30.75 v3(115.2,30.7) 115.2,25.8 116.775,24.225 Q3.S@116.775,20.405
  Bottom Layer w0.25: C31.1@115.2,29.6 v3(115.2,30.7)
  other v4: 114,1.7 112.02,2.52 115.98,2.52 111.2,4.5 116.8,4.5 112.02,6.48 115.98,6.48 114,7.3
SH_B_3: C43.1 J16.1 J18.2 Q15.S Q16.S Q21.D Q22.D U5.41 | length 15.5
  Top Layer w0.203: v3(32.8,30.7) 32.8,28.464 38.275,22.989
  Top Layer w0.25: v3(32.8,30.7) 32.85,30.75 U5.41@32.85,32.2 ; Q15.S@38.275,20.405 38.275,22.989
  Bottom Layer w0.25: C43.1@32.8,29.3 32.85,29.35 32.8,29.4 v3(32.8,30.7)
  other v4: 35.5,1.7 33.52,2.52 37.48,2.52 32.7,4.5 38.3,4.5 33.52,6.48 37.48,6.48 35.5,7.3
SH_C_2: C34.1 J12.1 J13.1 Q5.S Q6.S Q11.D Q12.D U4.36 | length 29.1
  Top Layer w0.25: Q5.S@99.775,20.405 99.7,20.48 99.7,26.841 102.006,29.147 110.917,29.147 112.75,30.98 U4.36@112.75,32.2 112.75,33.139 112.617,33.272 111.74,33.272 111,34.012 v3(111,34.3)
  Bottom Layer w0.25: v3(111,34.3) 111,34.012 111.74,33.272 112.728,33.272 113,33 C34.1@113,32.4
  other v4: 104.5,1.7 102.52,2.52 106.48,2.52 101.7,4.5 107.3,4.5 102.52,6.48 106.48,6.48 104.5,7.3
SH_C_3: C46.1 J17.1 J18.1 Q17.S Q18.S Q23.D Q24.D U5.36 | length 24.7
  Top Layer w0.203: Q17.S@21.275,20.405 21,20.68 21,26.1 24.047,29.147 28.517,29.147
  Top Layer w0.25: Q17.S@21.2,20.48 Q17.S@21.275,20.405 ; 28.517,29.147 30.35,30.98 30.35,33.05 30.172,33.228 29.484,33.228 28.772,33.94 28.772,34.228 v3(28.7,34.3)
  Bottom Layer w0.25: v3(28.7,34.3) 28.7,34.112 29.534,33.278 30.122,33.278 C46.1@30.9,32.5
  other v4: 26,1.7 24.02,2.52 27.98,2.52 23.2,4.5 28.8,4.5 24.02,6.48 27.98,6.48 26,7.3
SL_B_2: Q9.S Q10.S R23.1 R25.2 U4.39 | length 18.3
  Top Layer w0.203: v1(107.4,19.5) 107.5,19.6 R23.1@107.5,22.15
  Top Layer w0.25: Q9.S@109.275,20.405 109.275,23.134 113.978,27.837 113.978,31.202 114.25,31.474 U4.39@114.25,32.2
  Bottom Layer w1.5: v1@107.7,18.8 R25.2@109.425,18.8
  other v1: 106.9,18 107.4,18 107.9,18 106.9,18.5 107.4,18.5 107.9,18.5 106.9,19 107.4,19 107.9,19 106.9,19.5 107.9,19.5
SL_B_3: Q21.S Q22.S R41.1 R43.2 U5.39 | length 17.1
  Top Layer w0.203: v1(28.9,19.5) 29,19.6 R41.1@29,22.15 ; 30.775,23.134 32.086,24.445 32.086,25.65 31.578,26.158 31.578,31.202
  Top Layer w0.25: Q21.S@30.775,20.405 30.775,23.134 ; 31.578,31.202 31.828,31.452 31.828,32.178 U5.39@31.85,32.2
  Bottom Layer w1.5: v1@29.2,18.8 R43.2@30.925,18.8
  other v1: 28.4,18 28.9,18 29.4,18 28.4,18.5 28.9,18.5 29.4,18.5 28.4,19 28.9,19 29.4,19 28.4,19.5 29.4,19.5
SL_C_2: Q11.S Q12.S R26.2 R27.1 U4.34 | length 30.8
  Top Layer w0.203: v1(90.4,19.5) 90.5,19.6 R27.1@90.5,22.15
  Top Layer w0.25: Q11.S@92.275,20.405 92.275,22.973 94.521,25.219 95.058,25.219 99.892,30.053 110.542,30.053 111.75,31.261 U4.34@111.75,32.2
  Bottom Layer w1.5: v1@90.7,18.8 R26.2@92.425,18.8
  other v1: 90.4,18 90.9,18 90.4,18.5 90.9,18.5 90.4,19 90.9,19 90.9,19.5
  other v6: 89.9,18 89.9,18.5 89.9,19 89.9,19.5
SL_C_3: Q23.S Q24.S R44.2 R45.1 U5.34 | length 26.9
  Top Layer w0.203: v1(11.9,19.5) 12,19.6 R45.1@12,22.15 ; 13.775,22.875 13.775,22.94 20.888,30.053 28.142,30.053
  Top Layer w0.25: Q23.S@13.775,20.405 13.775,22.875 ; 28.142,30.053 29.35,31.261 U5.34@29.35,32.2
  Bottom Layer w1.5: v1@12.2,18.8 R44.2@13.925,18.8
  other v1: 11.4,18 11.9,18 12.4,18 11.4,18.5 11.9,18.5 12.4,18.5 11.4,19 11.9,19 12.4,19 11.4,19.5 12.4,19.5
SPI_MISO_1: U2.52 U4.10 U5.10 | length 102.2
  Top Layer w0.152: U5.10@35.85,39.8 35.85,40.581 37.114,41.845 42.415,41.845 42.714,41.546 57.671,41.546 58.054,41.929 58.054,42.854 v5(58.2,43) ; U2.52@79.515,42.333 80.847,43.665 82.187,43.665 82.643,44.121 82.94,44.121 83.519,44.7 v3(83.7,44.7) 83.779,44.779 85.242,44.779 86.034,43.987 86.034,43.233 89.099,40.168 101.423,40.168 106.633,45.378 114.897,45.378 117.237,43.037 118.25,42.025
  Top Layer w0.203: U4.10@118.25,39.8 118.25,42.025
  Bottom Layer w0.152: v5(58.2,43) 59.766,44.566 60.287,44.566 64.11,48.389 80.232,48.389 83.7,44.921 v3(83.7,44.7)
SPI_MOSI_1: U2.53 U4.9 U5.9 | length 103.1
  Top Layer w0.152: U5.9@36.35,39.8 36.35,40.579 37.261,41.49 42.267,41.49 42.567,41.19 57.818,41.19 58.428,41.8 v5(58.8,41.8) ; U2.53@79.162,42.687 80.496,44.021 82.04,44.021 82.7,44.681 v3(82.7,44.7) 83.99,45.99 85.415,45.99 86.39,45.015 86.39,43.38 89.247,40.523 101.276,40.523 106.486,45.733 115.116,45.733 117.525,43.325 118.739,42.11
  Top Layer w0.203: 118.739,42.11 118.739,40.661 118.75,40.65 U4.9@118.75,39.8
  Bottom Layer w0.152: v5(58.8,41.8) 58.854,41.854 58.854,42.979 60.086,44.211 60.434,44.211 64.257,48.034 79.785,48.034 80.085,48.034 82.379,45.74 82.379,45.021 v3(82.7,44.7)
SPI_SCK_1: U2.51 U4.11 U5.11 | length 102.8
  Top Layer w0.152: U5.11@35.35,39.8 35.35,40.584 36.967,42.201 42.562,42.201 42.73,42.033 57.233,42.033 v5(57.4,42.2) ; U2.51@79.869,41.98 81.199,43.31 82.334,43.31 82.79,43.765 83.087,43.765 83.417,44.095 v3@84.426,44.095 ; v3(84.531,44.2) 85.319,44.2 85.679,43.84 85.679,43.085 88.952,39.812 101.57,39.812 106.781,45.022 114.678,45.022 116.95,42.75 117.75,41.95
  Top Layer w0.203: v3@84.426,44.095 v3(84.531,44.2) ; U4.11@117.75,39.8 117.75,41.95
  Bottom Layer w0.152: v5(57.4,42.2) 57.4,43.125 59.196,44.921 60.14,44.921 63.963,48.744 80.475,48.744 84.531,44.688 v3(84.531,44.2)
SWCLK_1: J2.2 U2.49 | length 13.1
  Top Layer w0.152: U2.49@80.576,41.273 81.302,41.273 82.909,42.879 84.94,42.879 85.279,42.54 85.279,42.06 85.046,41.827 85.046,39.994 J2.2@88.54,36.5
SWDIO_1: J2.4 U2.46 | length 17.6
  Top Layer w0.203: U2.46@79.869,38.02 79.933,38.02 79.933,37.892 80.436,37.389 81.689,37.389 86.377,32.7 89.82,32.7 J2.4@93.62,36.5
USB_DM_1: R1.2 U2.44 | length 87.6
  Top Layer w0.203: U2.44@79.162,37.313 80.479,35.995 81.595,35.995 v3(81.6,36)
  Bottom Layer w0.152: R1.2@8.85,36.6 10.05,37.8 21.45,37.8 26.979,43.329 37.344,43.329 43.773,36.9 48.9,36.9 50.5,38.5 52.992,38.5 60.313,31.179 69.894,31.179 70.783,30.29 70.808,30.29 70.834,30.264 74.269,30.264 74.504,30.5 74.577,30.5
  Bottom Layer w0.203: 74.577,30.5 75.081,31.005 80.077,36 80.645,36 80.65,35.996 81.15,35.996 81.155,36 v3(81.6,36)
USB_DP_1: R2.2 U2.45 | length 85.4
  Top Layer w0.203: U2.45@79.515,37.667 80.582,36.6 v3(80.9,36.6)
  Bottom Layer w0.152: R2.2@8.85,38.2 21.348,38.2 26.832,43.684 37.491,43.684 43.92,37.255 48.753,37.255 50.353,38.855 53.139,38.855 60.46,31.534 70.041,31.534 70.93,30.645 70.955,30.645 70.981,30.619 74.122,30.619 74.601,31.099
  Bottom Layer w0.203: 74.601,31.099 74.913,31.411 80.102,36.6 v3(80.9,36.6)
VBUS_S_1: C1.2 R4.2 R5.1 U2.14 | length 26.5
  Top Layer w0.152: v3(64.9,43.4) 66.711,43.4 U2.14@68.131,41.98
  Top Layer w0.203: R4.2@59.95,25 59.95,29.934 62.2,32.184 v3(62.2,33.4)
  Bottom Layer w0.152: v3(62.2,33.4) 62.2,40.245 62.976,41.021 64.066,41.021 64.9,41.855 R5.1@64.9,42.05 v3(64.9,43.4)
  Bottom Layer w0.203: R5.1@64.9,42.05 65.25,41.7 C1.2@66.3,41.7
VCC: C7.1 C8.1 C9.1 C10.1 C19.2 C20.2 J2.1 J3.1 J4.1 J22.3 J22.4 L1.2 R7.1 R8.1 R9.1 R30.1 R31.1 R32.1 U1.3 U2.1 U2.19 U2.32 U2.48 U2.64 U3.2 U3.4 U4.49 U5.49 | length 232.9
  Top Layer w0.203: J4.1@10,48.7 10,44.14 14.64,39.5 v5(14.7,39.5) 14.535,39.335 U1.3@14.535,37.975 ; 38,30.8 37.557,30.8 36.805,31.552 U5.49@36.805,31.8 ; 66,37.8 66.411,37.389 67.564,37.389 68.067,37.892 68.067,38.02 U2.19@68.131,38.02 68.762,38.651 69.849,38.651 v3(70.3,38.2) ; U2.32@72.727,33.424 74.019,34.716 74.019,36.719 v3(74.1,36.8) ; U2.1@72.727,46.576 72.879,46.576 74.589,44.866 74.589,44.714 ; U2.64@75.273,46.576 74.589,45.892 74.589,44.714 ; v7(77.3,38.4) 78.311,39.411 79.334,39.411 ; U2.48@80.576,38.727 79.892,39.411 79.334,39.411 ; U4.49@119.25,32.2 119.25,33.705 120.145,34.6 ; U5.49@36.805,31.8 36.805,32.155 U5.49@36.85,32.2 36.85,31.845 U5.49@36.805,31.8 ; 74.589,44.714 74.589,44.511 v3(75.9,43.2) 75.9,42.845 79.334,39.411
  Top Layer w0.4: 120.145,34.6 121.523,35.978 128.222,35.978 130.478,33.722 131.322,33.722 136.66,39.06 J22.4@136.66,39.34 ; U3.4@131.3,45 131.3,44.7 J22.4@136.66,39.34 ; J22.3@139.2,39.34 J22.4@136.66,39.34
  Top Layer w0.5: 38,30.8 41.3,30.8 41.8,31.3 41.8,38.9 v5(42.5,39.6) 45.141,39.6 45.988,38.753 48.612,38.753 49.053,38.312 49.053,37.747 50.7,36.1 50.83,36.1 50.894,36.036 59.136,36.036 60.9,37.8 66,37.8 ; 79.892,39.507 79.985,39.6 82.9,39.6 J2.1@86,36.5 ; U3.2@124.7,45 U3.2@125.5,45 ; v5(126.3,45.8) U3.2@125.5,45 ; U3.4@131.3,45 U3.2@125.5,45
  Bottom Layer w0.152: C8.1@71.5,38 71.8,38.3 74,38.3 C9.1@74.3,38 75.021,38.721 76.466,38.721 77.145,39.4 C10.1@77.3,39.4 v7(77.3,38.4)
  Bottom Layer w0.203: v5(14.7,39.5) 14.7,40.95 C20.2@14.85,41.1 ; v3(70.3,38.2) 71.3,38.2 C8.1@71.5,38 ; v3@74.3,36.8 C9.1@74.3,38 ; v3(75.9,43.2) C7.1@75.9,42.1 C7.1@76.104,41.895
  Bottom Layer w0.5: C20.2@14.85,41.1 23.5,41.1 26.7,44.3 37.8,44.3 v5(42.5,39.6) ; L1.2@87.1,31.1 86,32.2 J2.1@86,36.5 90.928,41.428 90.928,44.199 92.557,45.828 93.922,45.828 ; R30.1@92.95,46.8 93.922,45.828 ; R31.1@96.25,46.8 95.278,45.828 ; R8.1@109.45,46.8 108.45,45.8 ; J3.1@117,48.5 117,46.928 ; v5(126.3,45.8) 125.15,45.8 C19.2@124.7,45.35 124.25,45.8 123.071,45.8 121.84,47.031 117.103,47.031 117,46.928 ; 93.922,45.828 95.278,45.828 ; 95.278,45.828 98.578,45.828 R32.1@99.55,46.8 99.35,47 100.876,47 101.504,47.628 102.531,47.628 103.159,47 104.25,47 R7.1@104.45,46.8 105.45,45.8 108.45,45.8 ; 108.45,45.8 111.75,45.8 112.878,46.928 117,46.928
pads on no net: C11.0 C12.0 C13.0 C14.0 C15.0 C16.0 C17.0 C18.0 D1.0 H1.1 H2.1 H3.1 H4.1 H5.1 H6.1 H7.1 H8.1 H9.1 H10.1 H11.1 H12.1 J1.1 J1.4 L1.0 Q1.7 Q1.9 Q1.10 Q1.11 Q3.7 Q3.9 Q3.10 Q3.11 Q5.7 Q5.9 Q5.10 Q5.11 Q7.7 Q7.9 Q7.10 Q7.11 Q8.7 Q8.9 Q8.10 Q8.11 Q9.7 Q9.9 Q9.10 Q9.11 Q10.7 Q10.9 Q10.10 Q10.11 Q11.7 Q11.9 Q11.10 Q11.11 Q12.7 Q12.9 Q12.10 Q12.11 Q13.7 Q13.9 Q13.10 Q13.11 Q15.7 Q15.9 Q15.10 Q15.11 Q17.7 Q17.9 Q17.10 Q17.11 Q19.7 Q19.9 Q19.10 Q19.11 Q20.7 Q20.9 Q20.10 Q20.11 Q21.7 Q21.9 Q21.10 Q21.11 Q22.7 Q22.9 Q22.10 Q22.11 Q23.7 Q23.9 Q23.10 Q23.11 Q24.7 Q24.9 Q24.10 Q24.11 Q26.7 Q26.9 Q26.10 Q26.11 Q28.7 Q28.9 Q28.10 Q28.11 Q29.7 Q29.9 Q29.10 Q29.11 Q30.7 Q30.9 Q30.10 Q30.11 R1.0 R2.0 R3.0 R4.0 R5.0 R6.0 R7.0 R8.0 R9.0 R11.0 R12.0 R13.0 R14.0 R15.0 R16.0 R17.0 R18.0 R19.0 R20.0 R21.0 R22.0 R23.0 R24.0 R27.0 R28.0 R30.0 R31.0 R32.0 R33.0 R34.0 R35.0 R36.0 R37.0 R38.0 R39.0 R40.0 R41.0 R42.0 R45.0 R46.0 R48.0 R49.0 R50.0 R52.0 R53.0 R54.0 R55.0 U1.5 U1.8 U3.0 U4.4 U4.55 U4.56 U5.1 U5.2 U5.3 U5.4 U5.50 U5.51 U5.52 U5.53 U5.54 U5.56 U7.4

## Polygon pours and split planes (outlines as drawn)
GND on Bottom Layer "GND_L02_P080" (solid, pour order 80): 0.5,27.479 140,27.479 140,49.5 0.5,49.5 0.5,27.5
AGND on Bottom Layer "AGND_L02_P077" (solid, pour order 77): 62.8,40.8 62.8,38.5 69.6,38.5 69.6,40.8 62.8,40.8
GND on Bottom Layer "GND_L02_P078" (solid, pour order 78): 0.5,20 0.5,27.5 140,27.5 140,20
DCBUS on Bottom Layer "DCBUS_L02_P079" (solid, pour order 79): 0.5,17.5 0.5,9 140,9 140,17.5
DCBUS on Bottom Layer "DCBUS_L02_P076" (solid, pour order 76): 84,18 85.5,19.5 88,19.5 89,18.5 89,17.5 84,17.5
DCBUS on Top Layer "DCBUS_L01_P063" (solid, pour order 63): 106,10.5 106,21 101.5,21 101.5,10.5
SH_C_2 on Top Layer "SH_C_2_L01_P072" (solid, pour order 72): 93.5,21 93.5,12 93,11.5 93,8.5 100.5,1 109.5,1 109.5,10 99.5,10 99.5,21
SL_B_2 on Top Layer "SL_B_2_L01_P059" (solid, pour order 59): 106.2,10.5 106.2,21 109.9,21 109.9,10.5
SL_C_2 on Top Layer "SL_C_2_L01_P057" (solid, pour order 57): 89.2,10.5 89.2,21 92.9,21 92.9,10.5
NetC54_2 on Top Layer "NETC54_2_L01_P073" (solid, pour order 73): 74.5,5 74.5,25.5 83,25.5 83,11 83,10.5 82.5,10.5 82.5,5 78.5,1
GND on Top Layer "GND_L01_P054" (solid, pour order 54): 123.216,10.5 123.216,21 126.916,21 126.916,10.5
SH_B_2 on Top Layer "SH_B_2_L01_P070" (solid, pour order 70): 109.5,21 109.5,10 109.5,1 119,1 119,10 117.5,11.5 117.5,21
SH_A_2 on Top Layer "SH_A_2_L01_P074" (solid, pour order 74): 127.5,21 127.5,11.851 125.5,10.05 119,10.05 119,1 126.5,1 135,9.5 135,21
NetJ20_1 on Top Layer "NETJ20_1_L01_P068" (solid, pour order 68): 63.5,3 62,6 62,20 68.5,20 70.8,4.5 68.3,0.7
GND on Top Layer "GND_L01_P066" (solid, pour order 66): 74,11 70,11 68.5,20 66,20 66,21.5 70,25.5 74,25.5
DCBUS on Top Layer "DCBUS_L01_P065" (solid, pour order 65): 123,10.5 123,21 118.5,21 118.5,10.5
DCBUS on Top Layer "DCBUS_L01_P064" (solid, pour order 64): 140,10.5 140,21 135.5,21 135.5,10.5
DCBUS on Top Layer "DCBUS_L01_P067" (solid, pour order 67): 83.5,9.5 89,9.5 89,25.5 83.5,25.5
DCBUS on Top Layer "DCBUS_L01_P062" (solid, pour order 62): 61.5,10.5 61.5,21 57,21 57,10.5
DCBUS on Top Layer "DCBUS_L01_P061" (solid, pour order 61): 44.5,10.5 44.5,21 40,21 40,10.5
SH_A_3 on Top Layer "SH_A_3_L01_P075" (solid, pour order 75): 49,21 49,11.851 47,10.05 40.5,10.05 40.5,1 48,1 56.5,9.5 56.5,21
SH_B_3 on Top Layer "SH_B_3_L01_P069" (solid, pour order 69): 31,21 31,10 31,1 40.5,1 40.5,10 39,11.5 39,21
GND on Top Layer "GND_L01_P056" (solid, pour order 56): 44.716,10.5 44.716,21 48.416,21 48.416,10.5
SL_C_3 on Top Layer "SL_C_3_L01_P058" (solid, pour order 58): 10.7,10.5 10.7,21 14.4,21 14.4,10.5
SL_B_3 on Top Layer "SL_B_3_L01_P055" (solid, pour order 55): 27.7,10.5 27.7,21 31.4,21 31.4,10.5
SH_C_3 on Top Layer "SH_C_3_L01_P071" (solid, pour order 71): 15,21 15,12 14.5,11.5 14.5,8.5 22,1 31,1 31,10 21,10 21,21
DCBUS on Top Layer "DCBUS_L01_P060" (solid, pour order 60): 27.5,10.5 27.5,21 23,21 23,10.5

## Silkscreen, mask and mechanical layers (free items; w line width, h text height)
Top Paste:
  rectangle: 64.6,17.6 67.2,19.7
  rectangle: 66.2,20.2 71.3,21.3
  rectangle: 11.1,17.7 12.7,19.8
  rectangle: 28.1,17.7 29.7,19.8
  rectangle: 45.1,17.7 46.7,19.8
  rectangle: 89.6,17.7 91.2,19.8
  rectangle: 106.6,17.7 108.2,19.8
  rectangle: 123.6,17.7 125.2,19.8
Bottom Paste:
  rectangle: 64.6,17.6 67.2,19.7
  rectangle: 66.2,20.2 71.3,21.3
  rectangle: 11.1,17.7 12.7,19.8
  rectangle: 28.1,17.7 29.7,19.8
  rectangle: 45.1,17.7 46.7,19.8
  rectangle: 89.6,17.7 91.2,19.8
  rectangle: 106.6,17.7 108.2,19.8
  rectangle: 123.6,17.7 125.2,19.8

## Text inside footprints (layer, text, board x,y; h text height)
J22: Top Overlay "1" at 139.708,34.768 h1.27 r90; Top Overlay "2" at 137.168,34.26 h1.27 r90; Top Overlay "5" at 139.708,43.404 h1.27 r90; Top Overlay "6" at 137.168,43.404 h1.27 r90